# EAGLE board Control_Logic (EAGLE 9.3.2)
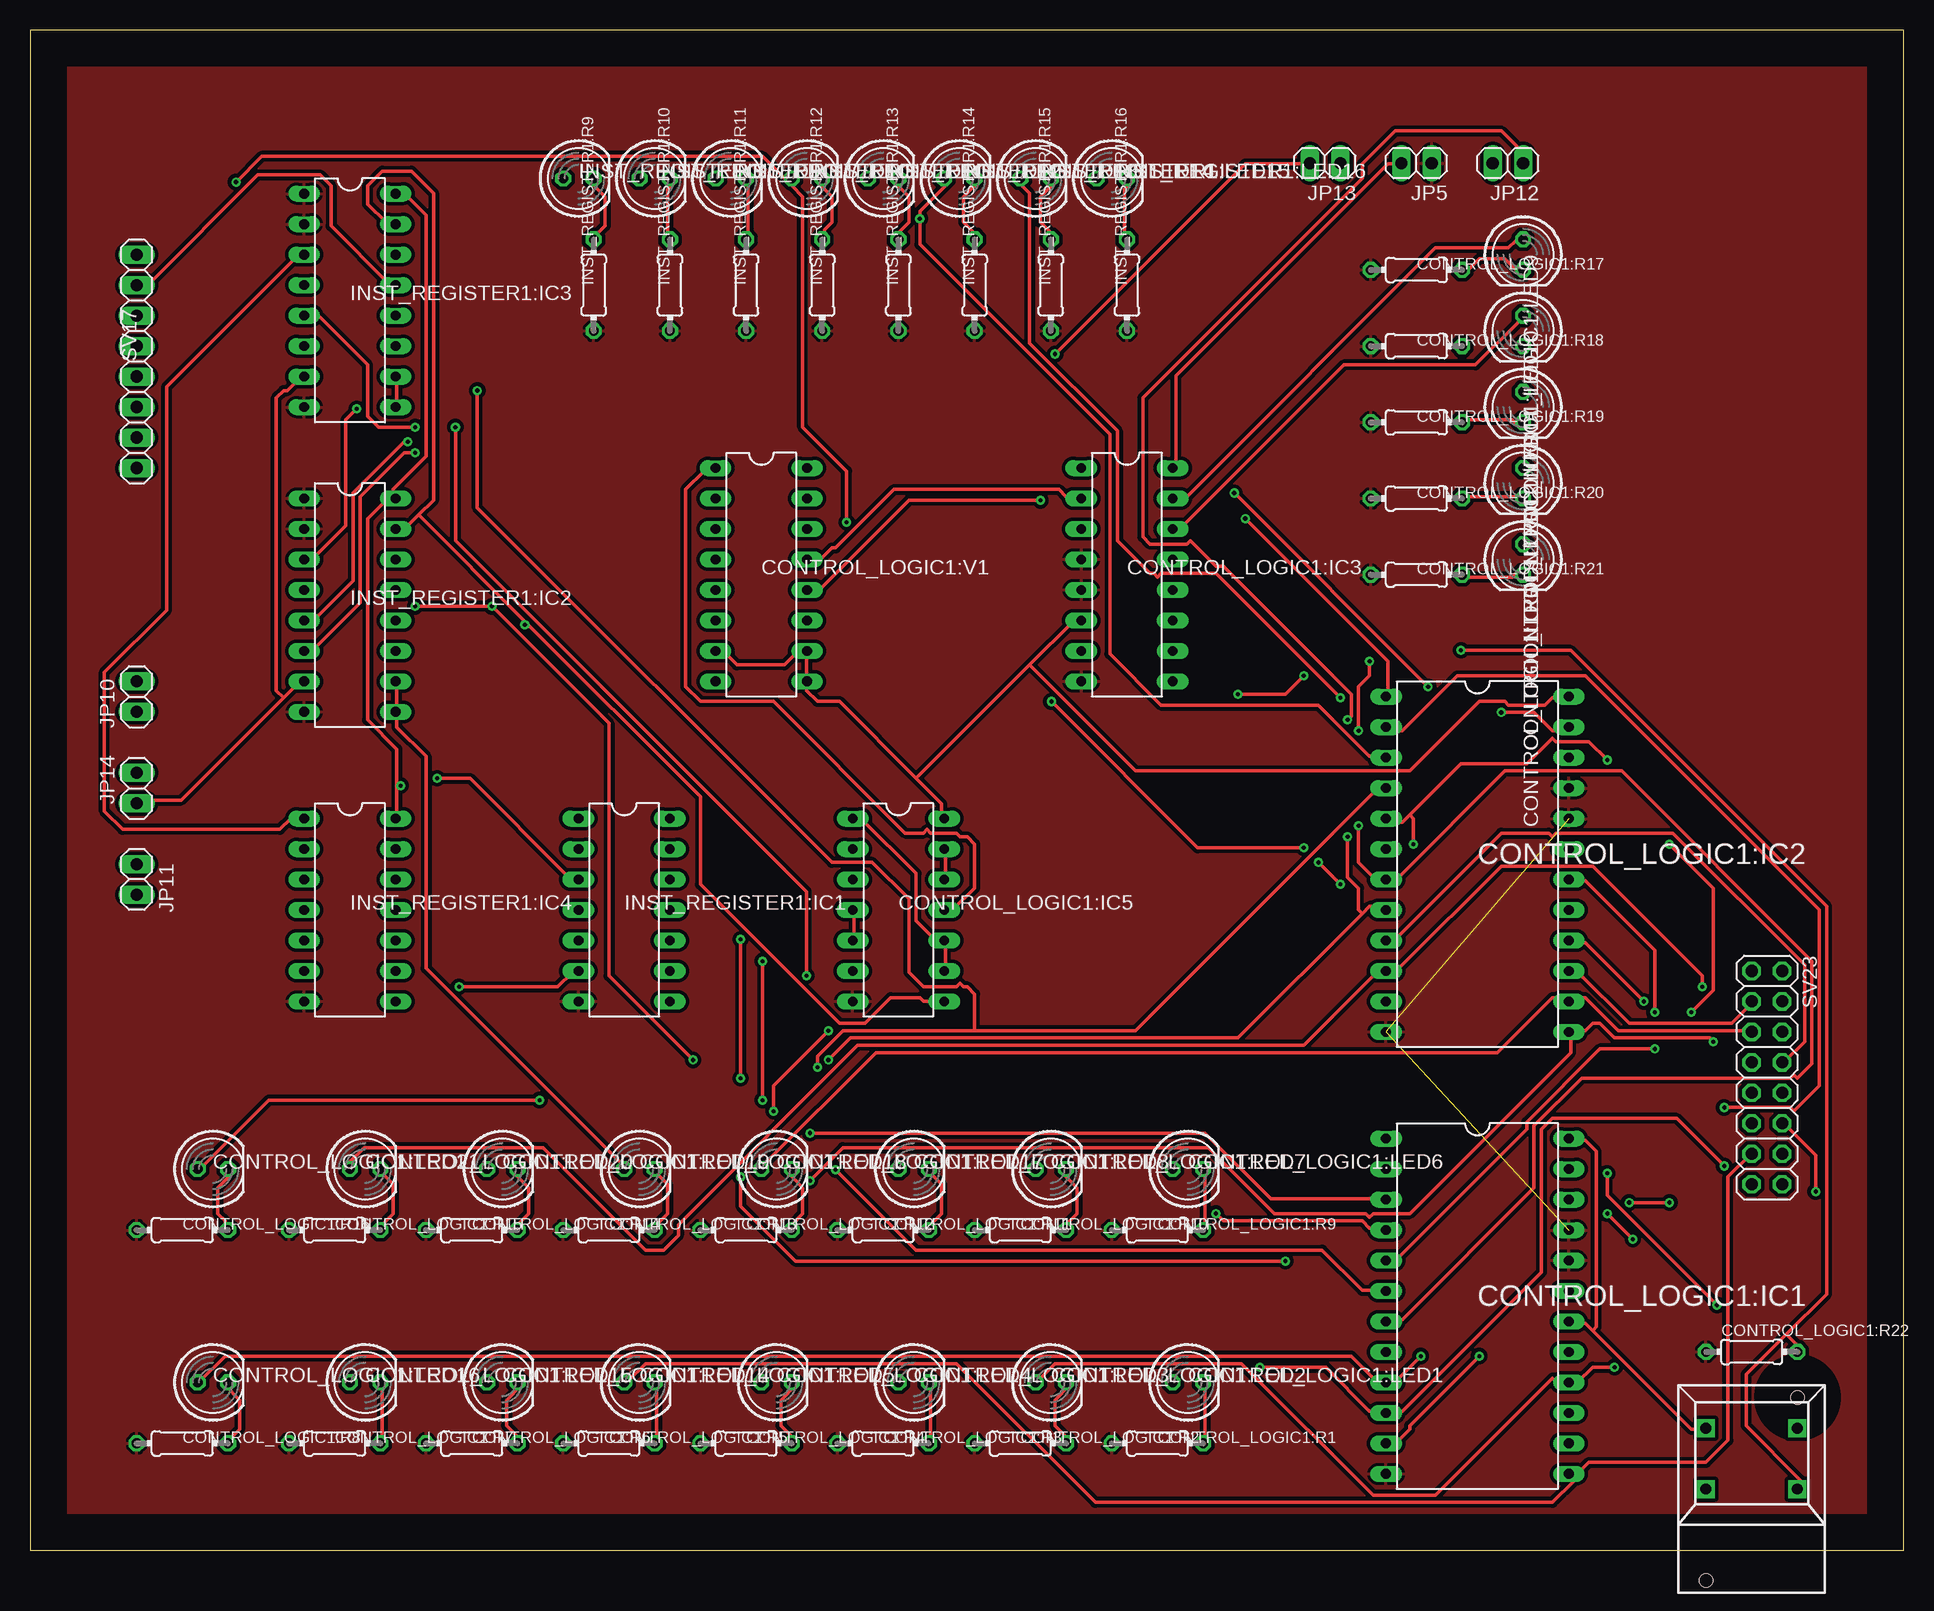
[diagram p0: board, top side]
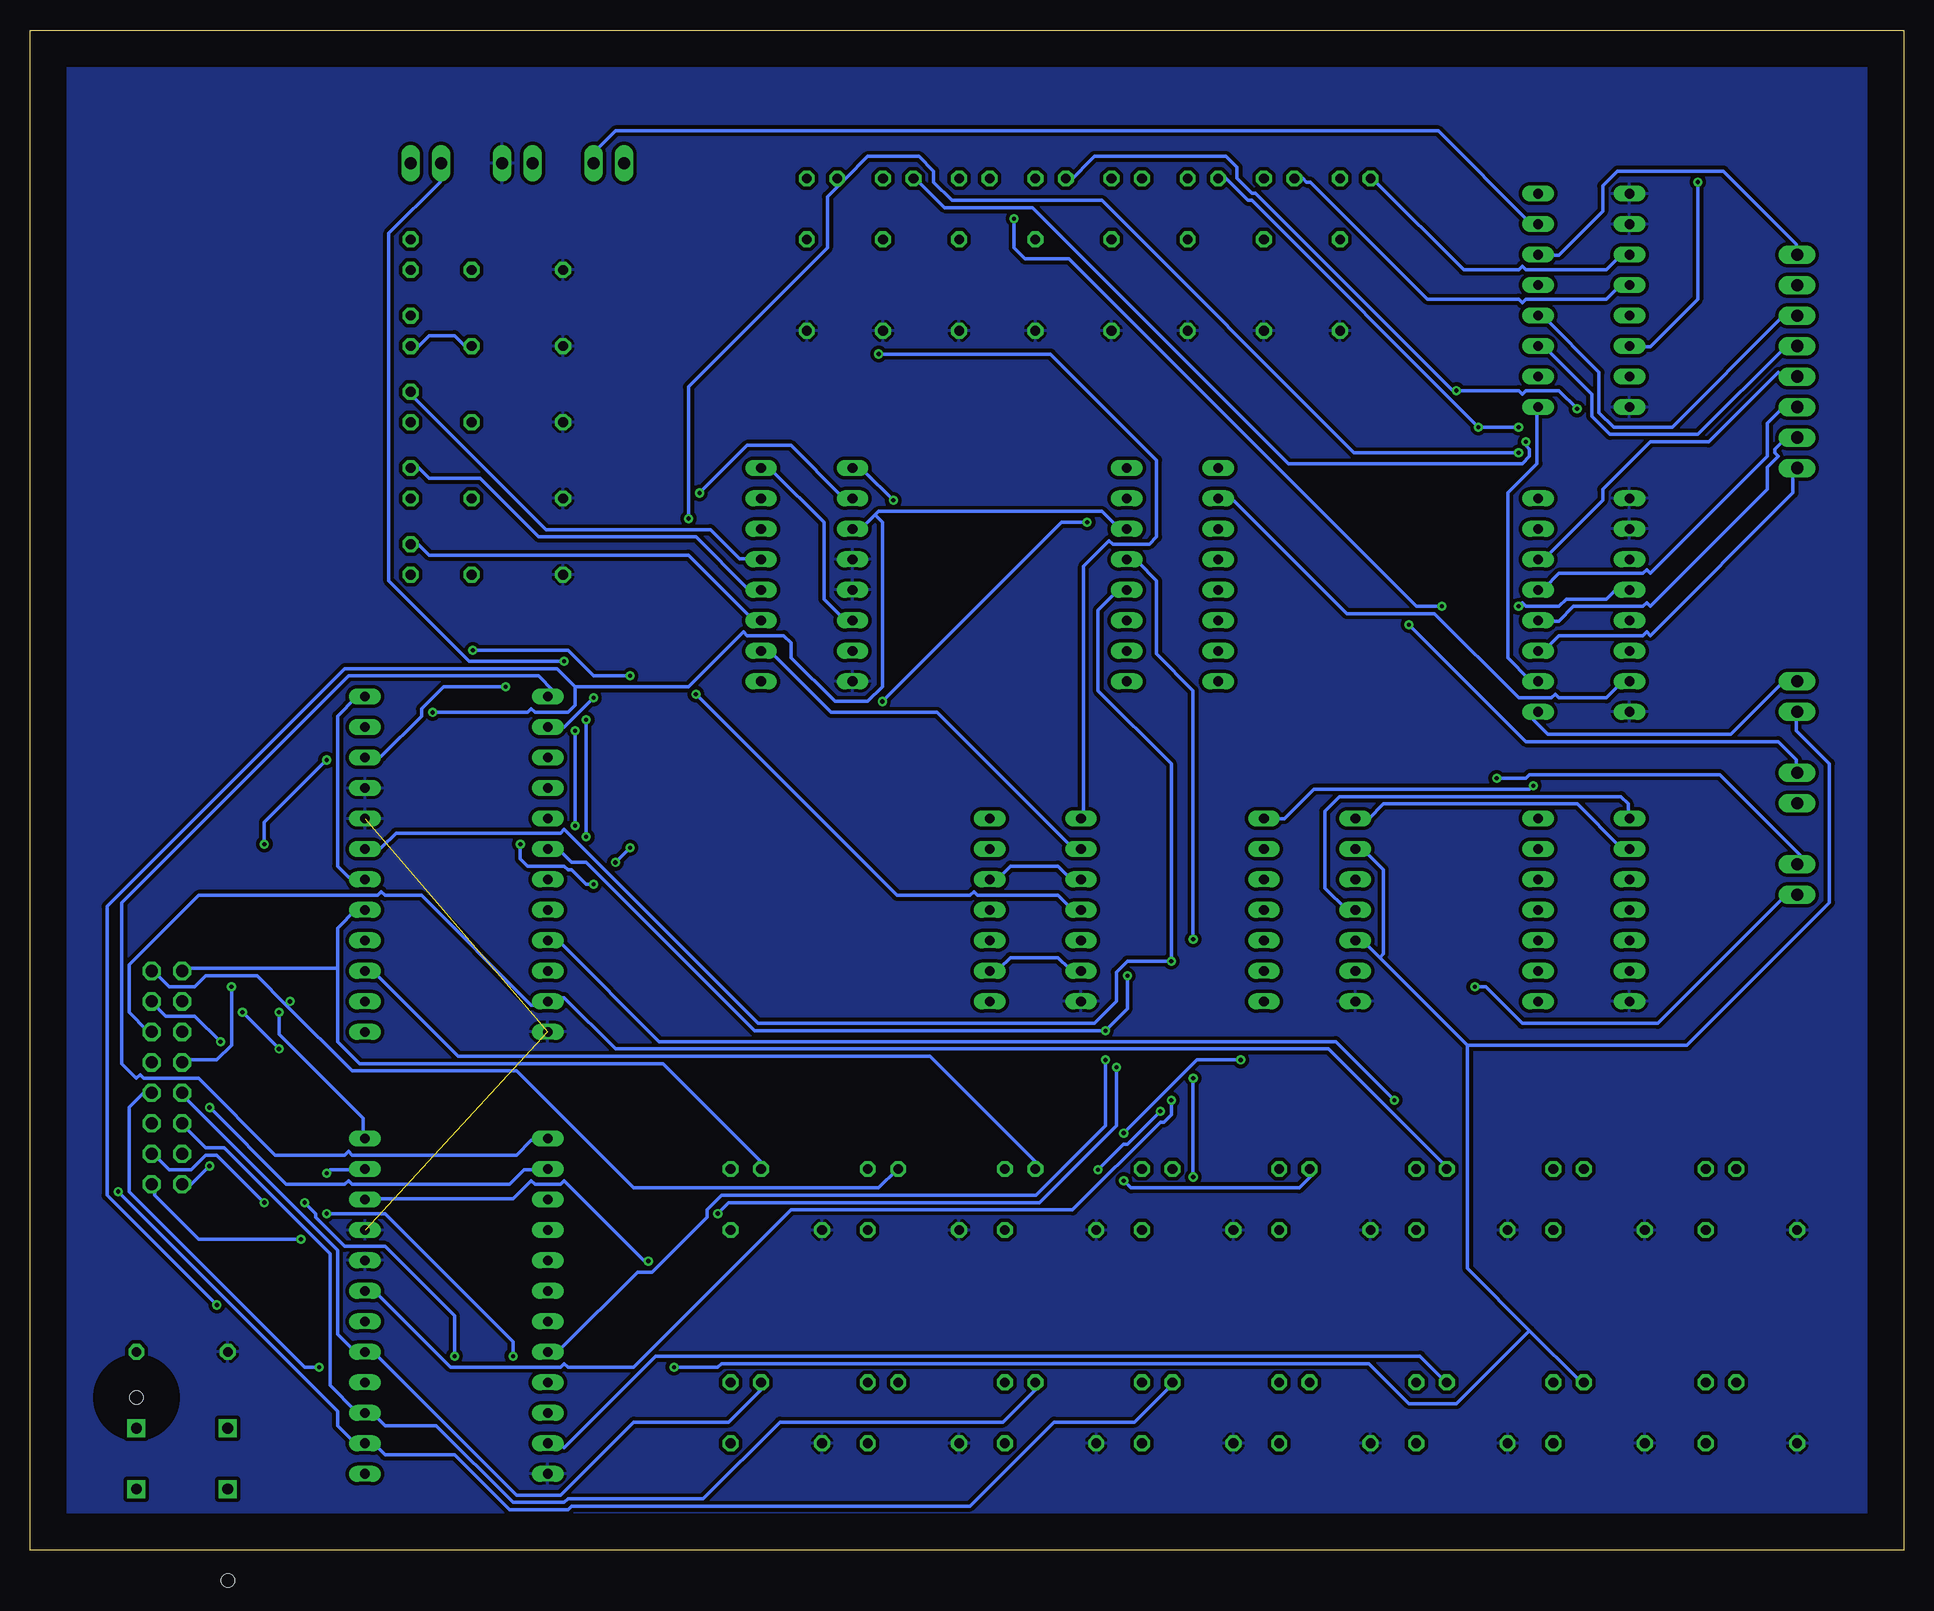
[diagram p1: board, bottom side, seen from below]

Size 156.19 x 126.67 mm. Coordinates in mm from the lower left corner, seen from the top.
Outline: 0,0 156.19,0 156.19,126.67 0,126.67 0,0
Copper layers (1*16): Top 0.035mm / dielectric 1.5mm / Bottom 0.035mm
Design rules "Endustriyel": minimum track width 12mil, minimum drill 0.35mm, track to track 12mil, track to pad 12mil, pad to pad 12mil, via to via 12mil, smd to smd 6mil, copper to edge 120mil, drill to drill 12mil, minimum pad ring 10mil, minimum via ring 8mil, stop-mask expansion 4mil, vias tented up to drill 0mil, thermal gap 10mil
Net classes: 0 default: width 0.254 mm

## Footprints (pad centres in the part's own frame; a part is rotated, then mirrored left to right if it is on the bottom)
DIL24 = drill 0.813 long: 1 -13.97,-7.62; 2 -11.43,-7.62; 3 -8.89,-7.62; 4 -6.35,-7.62; 5 -3.81,-7.62; 6 -1.27,-7.62; 7 1.27,-7.62; 8 3.81,-7.62; 9 6.35,-7.62; 10 8.89,-7.62; 11 11.43,-7.62; 12 13.97,-7.62; 13 13.97,7.62; 14 11.43,7.62; 15 8.89,7.62; 16 6.35,7.62; 17 3.81,7.62; 18 1.27,7.62; 19 -1.27,7.62; 20 -3.81,7.62; 21 -6.35,7.62; 22 -8.89,7.62; 23 -11.43,7.62; 24 -13.97,7.62
DIL16 = drill 0.813 long: 1 -8.89,-3.81; 2 -6.35,-3.81; 3 -3.81,-3.81; 4 -1.27,-3.81; 5 1.27,-3.81; 6 3.81,-3.81; 7 6.35,-3.81; 8 8.89,-3.81; 9 8.89,3.81; 10 6.35,3.81; 11 3.81,3.81; 12 1.27,3.81; 13 -1.27,3.81; 14 -3.81,3.81; 15 -6.35,3.81; 16 -8.89,3.81
DIL14 = drill 0.813 long: 1 -7.62,-3.81; 2 -5.08,-3.81; 3 -2.54,-3.81; 4 0,-3.81; 5 2.54,-3.81; 6 5.08,-3.81; 7 7.62,-3.81; 8 7.62,3.81; 9 5.08,3.81; 10 2.54,3.81; 11 0,3.81; 12 -2.54,3.81; 13 -5.08,3.81; 14 -7.62,3.81
LED5MM = drill 0.813 octagon: A -1.27,0; K 1.27,0
0204/7 = drill 0.813 octagon: 1 -3.81,0; 2 3.81,0
5501 = drill 0.9 pad 1.5 square: 1A 0,3.81; 1B 0,-3.81; NC 5.08,-3.81; NO 5.08,3.81 | hole 1.1: -7.62,3.81; 7.62,-3.81
1X02 = drill 1.016 long: 1 -1.27,0; 2 1.27,0
1X08 = drill 1.016 long: 1 -8.89,0; 2 -6.35,0; 3 -3.81,0; 4 -1.27,0; 5 1.27,0; 6 3.81,0; 7 6.35,0; 8 8.89,0
2X08 = drill 1.016 octagon: 1 -8.89,-1.27; 2 -8.89,1.27; 3 -6.35,-1.27; 4 -6.35,1.27; 5 -3.81,-1.27; 6 -3.81,1.27; 7 -1.27,-1.27; 8 -1.27,1.27; 9 1.27,-1.27; 10 1.27,1.27; 11 3.81,-1.27; 12 3.81,1.27; 13 6.35,-1.27; 14 6.35,1.27; 15 8.89,-1.27; 16 8.89,1.27

## Placement (x,y rotation side)
CONTROL_LOGIC1:IC1  [DIL24]  120.65,20.32 270 top
CONTROL_LOGIC1:IC2  [DIL24]  120.65,57.15 270 top
CONTROL_LOGIC1:IC3  74AC138N  [DIL16]  91.44,81.28 270 top
CONTROL_LOGIC1:IC5  74AC00N  [DIL14]  72.39,53.34 270 top
CONTROL_LOGIC1:LED1  [LED5MM]  96.52,13.97 0 top
CONTROL_LOGIC1:LED2  [LED5MM]  85.09,13.97 0 top
CONTROL_LOGIC1:LED3  [LED5MM]  73.66,13.97 0 top
CONTROL_LOGIC1:LED4  [LED5MM]  62.23,13.97 0 top
CONTROL_LOGIC1:LED5  [LED5MM]  50.8,13.97 0 top
CONTROL_LOGIC1:LED6  [LED5MM]  96.52,31.75 0 top
CONTROL_LOGIC1:LED7  [LED5MM]  85.09,31.75 0 top
CONTROL_LOGIC1:LED8  [LED5MM]  73.66,31.75 0 top
CONTROL_LOGIC1:LED9  [LED5MM]  124.46,107.95 270 top
CONTROL_LOGIC1:LED10  [LED5MM]  124.46,101.6 270 top
CONTROL_LOGIC1:LED11  [LED5MM]  124.46,95.25 270 top
CONTROL_LOGIC1:LED12  [LED5MM]  124.46,88.9 270 top
CONTROL_LOGIC1:LED13  [LED5MM]  124.46,82.55 270 top
CONTROL_LOGIC1:LED14  [LED5MM]  39.37,13.97 0 top
CONTROL_LOGIC1:LED15  [LED5MM]  27.94,13.97 0 top
CONTROL_LOGIC1:LED16  [LED5MM]  15.24,13.97 0 top
CONTROL_LOGIC1:LED17  [LED5MM]  62.23,31.75 0 top
CONTROL_LOGIC1:LED18  [LED5MM]  50.8,31.75 0 top
CONTROL_LOGIC1:LED19  [LED5MM]  39.37,31.75 0 top
CONTROL_LOGIC1:LED20  [LED5MM]  27.94,31.75 0 top
CONTROL_LOGIC1:LED21  [LED5MM]  15.24,31.75 0 top
CONTROL_LOGIC1:R1  220  [0204/7]  93.98,8.89 0 top
CONTROL_LOGIC1:R2  220  [0204/7]  82.55,8.89 0 top
CONTROL_LOGIC1:R3  220  [0204/7]  71.12,8.89 0 top
CONTROL_LOGIC1:R4  220  [0204/7]  59.69,8.89 0 top
CONTROL_LOGIC1:R5  220  [0204/7]  48.26,8.89 0 top
CONTROL_LOGIC1:R6  220  [0204/7]  36.83,8.89 0 top
CONTROL_LOGIC1:R7  220  [0204/7]  25.4,8.89 0 top
CONTROL_LOGIC1:R8  220  [0204/7]  12.7,8.89 0 top
CONTROL_LOGIC1:R9  220  [0204/7]  93.98,26.67 0 top
CONTROL_LOGIC1:R10  220  [0204/7]  82.55,26.67 0 top
CONTROL_LOGIC1:R11  220  [0204/7]  71.12,26.67 0 top
CONTROL_LOGIC1:R12  220  [0204/7]  59.69,26.67 0 top
CONTROL_LOGIC1:R13  220  [0204/7]  48.26,26.67 0 top
CONTROL_LOGIC1:R14  220  [0204/7]  36.83,26.67 0 top
CONTROL_LOGIC1:R15  220  [0204/7]  25.4,26.67 0 top
CONTROL_LOGIC1:R16  220  [0204/7]  12.7,26.67 0 top
CONTROL_LOGIC1:R17  220  [0204/7]  115.57,106.68 0 top
CONTROL_LOGIC1:R18  220  [0204/7]  115.57,100.33 0 top
CONTROL_LOGIC1:R19  220  [0204/7]  115.57,93.98 0 top
CONTROL_LOGIC1:R20  220  [0204/7]  115.57,87.63 0 top
CONTROL_LOGIC1:R21  220  [0204/7]  115.57,81.28 0 top
CONTROL_LOGIC1:R22  10K  [0204/7]  143.51,16.51 0 top
CONTROL_LOGIC1:S1  5501  [5501]  143.51,5.08 90 top
CONTROL_LOGIC1:V1  74161N  [DIL16]  60.96,81.28 270 top
INST_REGISTER1:IC1  74ALS09N  [DIL14]  49.53,53.34 270 top
INST_REGISTER1:IC2  74HC173N  [DIL16]  26.67,78.74 270 top
INST_REGISTER1:IC3  74HC173N  [DIL16]  26.67,104.14 270 top
INST_REGISTER1:IC4  74AC04N  [DIL14]  26.67,53.34 270 top
INST_REGISTER1:LED9  [LED5MM]  45.72,114.3 0 top
INST_REGISTER1:LED10  [LED5MM]  52.07,114.3 0 top
INST_REGISTER1:LED11  [LED5MM]  58.42,114.3 0 top
INST_REGISTER1:LED12  [LED5MM]  64.77,114.3 0 top
INST_REGISTER1:LED13  [LED5MM]  71.12,114.3 0 top
INST_REGISTER1:LED14  [LED5MM]  77.47,114.3 0 top
INST_REGISTER1:LED15  [LED5MM]  83.82,114.3 0 top
INST_REGISTER1:LED16  [LED5MM]  90.17,114.3 0 top
INST_REGISTER1:R9  220  [0204/7]  46.99,105.41 90 top
INST_REGISTER1:R10  220  [0204/7]  53.34,105.41 90 top
INST_REGISTER1:R11  220  [0204/7]  59.69,105.41 90 top
INST_REGISTER1:R12  220  [0204/7]  66.04,105.41 90 top
INST_REGISTER1:R13  220  [0204/7]  72.39,105.41 90 top
INST_REGISTER1:R14  220  [0204/7]  78.74,105.41 90 top
INST_REGISTER1:R15  220  [0204/7]  85.09,105.41 90 top
INST_REGISTER1:R16  220  [0204/7]  91.44,105.41 90 top
JP5  [1X02]  115.57,115.57 180 top
JP10  [1X02]  8.89,71.12 90 top
JP11  [1X02]  8.89,55.88 270 top
JP12  [1X02]  123.19,115.57 180 top
JP13  [1X02]  107.95,115.57 180 top
JP14  [1X02]  8.89,63.5 90 top
SV17  [1X08]  8.89,99.06 90 top
SV23  [2X08]  144.78,39.37 270 top

## Library data of the parts
CONTROL_LOGIC1:IC1 CONTROL_LOGIC1:IC2 = memory
CONTROL_LOGIC1:IC3 CONTROL_LOGIC1:IC5 INST_REGISTER1:IC1-INST_REGISTER1:IC4 = 74xx-eu
CONTROL_LOGIC1:LED1-CONTROL_LOGIC1:LED21 INST_REGISTER1:LED9-INST_REGISTER1:LED16 = led
CONTROL_LOGIC1:R1-CONTROL_LOGIC1:R22 INST_REGISTER1:R9-INST_REGISTER1:R16 = rcl; SPICEPREFIX: R
CONTROL_LOGIC1:S1 = switch
CONTROL_LOGIC1:V1 = 74ttl-din
JP5 JP10-JP14 = pinhead
SV17 SV23 = pinhead; OC_FARNELL: unknown; OC_NEWARK: unknown

## Nets
8B_1: INST_REGISTER1:IC3.14 SV17.8
8B_2: INST_REGISTER1:IC3.13 SV17.7
8B_3: INST_REGISTER1:IC3.12 SV17.6
8B_4: INST_REGISTER1:IC3.11 SV17.5
8B_5: INST_REGISTER1:IC2.14 SV17.4
8B_6: INST_REGISTER1:IC2.13 SV17.3
8B_7: INST_REGISTER1:IC2.12 SV17.2
8B_8: INST_REGISTER1:IC2.11 SV17.1
ALUSUB: CONTROL_LOGIC1:IC1.15 CONTROL_LOGIC1:LED3.A SV23.11
CF: CONTROL_LOGIC1:IC1.7 CONTROL_LOGIC1:IC2.7 JP12.2
CLK: CONTROL_LOGIC1:V1.2 INST_REGISTER1:IC2.7 INST_REGISTER1:IC3.7 JP14.1
CLR: CONTROL_LOGIC1:IC5.8 INST_REGISTER1:IC2.15 INST_REGISTER1:IC3.15 JP13.1 JP14.2
CONTROL_LOGIC1:+UB: CONTROL_LOGIC1:V1.16
CONTROL_LOGIC1:-UB: CONTROL_LOGIC1:V1.8
CONTROL_LOGIC1:N$1: CONTROL_LOGIC1:IC1.19 CONTROL_LOGIC1:IC2.19 CONTROL_LOGIC1:IC3.1 CONTROL_LOGIC1:V1.12
CONTROL_LOGIC1:N$2: CONTROL_LOGIC1:IC1.22 CONTROL_LOGIC1:IC2.22 CONTROL_LOGIC1:IC3.2 CONTROL_LOGIC1:V1.13
CONTROL_LOGIC1:N$3: CONTROL_LOGIC1:IC1.23 CONTROL_LOGIC1:IC2.23 CONTROL_LOGIC1:IC3.3 CONTROL_LOGIC1:V1.14
CONTROL_LOGIC1:N$4: CONTROL_LOGIC1:IC3.10 CONTROL_LOGIC1:IC5.2
CONTROL_LOGIC1:N$5: CONTROL_LOGIC1:IC3.15 CONTROL_LOGIC1:LED9.A
CONTROL_LOGIC1:N$6: CONTROL_LOGIC1:IC3.14 CONTROL_LOGIC1:LED10.A
CONTROL_LOGIC1:N$7: CONTROL_LOGIC1:IC5.3 CONTROL_LOGIC1:IC5.12 CONTROL_LOGIC1:IC5.13
CONTROL_LOGIC1:N$8: CONTROL_LOGIC1:IC5.11 CONTROL_LOGIC1:V1.1
CONTROL_LOGIC1:N$9: CONTROL_LOGIC1:IC3.13 CONTROL_LOGIC1:LED11.A
CONTROL_LOGIC1:N$10: CONTROL_LOGIC1:IC3.12 CONTROL_LOGIC1:LED12.A
CONTROL_LOGIC1:N$11: CONTROL_LOGIC1:IC3.11 CONTROL_LOGIC1:LED13.A
CONTROL_LOGIC1:N$12: CONTROL_LOGIC1:LED6.K CONTROL_LOGIC1:R9.2
CONTROL_LOGIC1:N$13: CONTROL_LOGIC1:LED7.K CONTROL_LOGIC1:R10.2
CONTROL_LOGIC1:N$14: CONTROL_LOGIC1:LED8.K CONTROL_LOGIC1:R11.2
CONTROL_LOGIC1:N$15: CONTROL_LOGIC1:LED17.K CONTROL_LOGIC1:R12.2
CONTROL_LOGIC1:N$16: CONTROL_LOGIC1:LED18.K CONTROL_LOGIC1:R13.2
CONTROL_LOGIC1:N$17: CONTROL_LOGIC1:LED19.K CONTROL_LOGIC1:R14.2
CONTROL_LOGIC1:N$18: CONTROL_LOGIC1:LED20.K CONTROL_LOGIC1:R15.2
CONTROL_LOGIC1:N$19: CONTROL_LOGIC1:LED21.K CONTROL_LOGIC1:R16.2
CONTROL_LOGIC1:N$20: CONTROL_LOGIC1:LED1.K CONTROL_LOGIC1:R1.2
CONTROL_LOGIC1:N$21: CONTROL_LOGIC1:LED2.K CONTROL_LOGIC1:R2.2
CONTROL_LOGIC1:N$22: CONTROL_LOGIC1:LED3.K CONTROL_LOGIC1:R3.2
CONTROL_LOGIC1:N$23: CONTROL_LOGIC1:LED4.K CONTROL_LOGIC1:R4.2
CONTROL_LOGIC1:N$24: CONTROL_LOGIC1:LED5.K CONTROL_LOGIC1:R5.2
CONTROL_LOGIC1:N$25: CONTROL_LOGIC1:LED14.K CONTROL_LOGIC1:R6.2
CONTROL_LOGIC1:N$26: CONTROL_LOGIC1:LED15.K CONTROL_LOGIC1:R7.2
CONTROL_LOGIC1:N$28: CONTROL_LOGIC1:LED16.K CONTROL_LOGIC1:R8.2
CONTROL_LOGIC1:N$29: CONTROL_LOGIC1:LED9.K CONTROL_LOGIC1:R17.2
CONTROL_LOGIC1:N$30: CONTROL_LOGIC1:LED10.K CONTROL_LOGIC1:R18.2
CONTROL_LOGIC1:N$31: CONTROL_LOGIC1:LED11.K CONTROL_LOGIC1:R19.2
CONTROL_LOGIC1:N$32: CONTROL_LOGIC1:LED12.K CONTROL_LOGIC1:R20.2
CONTROL_LOGIC1:N$33: CONTROL_LOGIC1:LED13.K CONTROL_LOGIC1:R21.2
COUNT: CONTROL_LOGIC1:IC2.14 CONTROL_LOGIC1:LED17.A SV23.5
GND: CONTROL_LOGIC1:IC1.12 CONTROL_LOGIC1:IC1.20 CONTROL_LOGIC1:IC1.21 CONTROL_LOGIC1:IC2.12 CONTROL_LOGIC1:IC2.20 CONTROL_LOGIC1:IC2.21 CONTROL_LOGIC1:IC3.4 CONTROL_LOGIC1:IC3.5 CONTROL_LOGIC1:IC3.8 CONTROL_LOGIC1:IC5.7 CONTROL_LOGIC1:R1.1 CONTROL_LOGIC1:R2.1 CONTROL_LOGIC1:R3.1 CONTROL_LOGIC1:R4.1 CONTROL_LOGIC1:R5.1 CONTROL_LOGIC1:R6.1 CONTROL_LOGIC1:R7.1 CONTROL_LOGIC1:R8.1 CONTROL_LOGIC1:R9.1 CONTROL_LOGIC1:R10.1 CONTROL_LOGIC1:R11.1 CONTROL_LOGIC1:R12.1 CONTROL_LOGIC1:R13.1 CONTROL_LOGIC1:R14.1 CONTROL_LOGIC1:R15.1 CONTROL_LOGIC1:R16.1 CONTROL_LOGIC1:R17.1 CONTROL_LOGIC1:R18.1 CONTROL_LOGIC1:R19.1 CONTROL_LOGIC1:R20.1 CONTROL_LOGIC1:R21.1 CONTROL_LOGIC1:R22.1 INST_REGISTER1:IC1.7 INST_REGISTER1:IC2.1 INST_REGISTER1:IC2.2 INST_REGISTER1:IC2.8 INST_REGISTER1:IC3.1 INST_REGISTER1:IC3.2 INST_REGISTER1:IC3.8 INST_REGISTER1:IC4.7 INST_REGISTER1:R9.1 INST_REGISTER1:R10.1 INST_REGISTER1:R11.1 INST_REGISTER1:R12.1 INST_REGISTER1:R13.1 INST_REGISTER1:R14.1 INST_REGISTER1:R15.1 INST_REGISTER1:R16.1 JP5.1
HLT: CONTROL_LOGIC1:IC1.9 CONTROL_LOGIC1:LED16.A SV23.16
INST_REGISTER1:INST_2: INST_REGISTER1:IC3.4 INST_REGISTER1:LED10.A
INST_REGISTER1:N$1: INST_REGISTER1:LED9.K INST_REGISTER1:R9.2
INST_REGISTER1:N$2: INST_REGISTER1:LED10.K INST_REGISTER1:R10.2
INST_REGISTER1:N$3: INST_REGISTER1:LED11.K INST_REGISTER1:R11.2
INST_REGISTER1:N$4: INST_REGISTER1:IC1.1 INST_REGISTER1:IC4.2
INST_REGISTER1:N$5: INST_REGISTER1:LED12.K INST_REGISTER1:R12.2
INST_REGISTER1:N$6: INST_REGISTER1:LED13.K INST_REGISTER1:R13.2
INST_REGISTER1:N$7: INST_REGISTER1:LED14.K INST_REGISTER1:R14.2
INST_REGISTER1:N$8: INST_REGISTER1:LED15.K INST_REGISTER1:R15.2
INST_REGISTER1:N$9: INST_REGISTER1:LED16.K INST_REGISTER1:R16.2
INST_REGISTER1:SLC_REG: INST_REGISTER1:IC1.4 INST_REGISTER1:IC3.3 INST_REGISTER1:IC4.1 INST_REGISTER1:LED9.A
INST_REGISTER1:VCC: INST_REGISTER1:IC1.14 INST_REGISTER1:IC2.16 INST_REGISTER1:IC3.16 INST_REGISTER1:IC4.14
N$32: CONTROL_LOGIC1:IC1.6 CONTROL_LOGIC1:IC2.6 INST_REGISTER1:IC3.5 INST_REGISTER1:LED11.A
N$33: CONTROL_LOGIC1:IC1.5 CONTROL_LOGIC1:IC2.5 INST_REGISTER1:IC3.6 INST_REGISTER1:LED12.A
N$34: CONTROL_LOGIC1:IC1.4 CONTROL_LOGIC1:IC2.4 INST_REGISTER1:IC2.3 INST_REGISTER1:LED13.A
N$35: CONTROL_LOGIC1:IC1.3 CONTROL_LOGIC1:IC2.3 INST_REGISTER1:IC2.4 INST_REGISTER1:LED14.A
N$36: CONTROL_LOGIC1:IC1.2 CONTROL_LOGIC1:IC2.2 INST_REGISTER1:IC2.5 INST_REGISTER1:LED15.A
N$37: CONTROL_LOGIC1:IC1.1 CONTROL_LOGIC1:IC2.1 INST_REGISTER1:IC2.6 INST_REGISTER1:LED16.A
N$79: CONTROL_LOGIC1:IC2.15 CONTROL_LOGIC1:LED8.A SV23.3
N$80: CONTROL_LOGIC1:IC2.16 CONTROL_LOGIC1:LED7.A SV23.2
N$81: CONTROL_LOGIC1:IC2.17 CONTROL_LOGIC1:LED6.A SV23.1
PC_LE: CONTROL_LOGIC1:IC1.16 CONTROL_LOGIC1:LED2.A SV23.10
PC_LRS: CONTROL_LOGIC1:IC1.17 CONTROL_LOGIC1:LED1.A SV23.9
RAM_LRS: CONTROL_LOGIC1:IC2.9 CONTROL_LOGIC1:LED21.A SV23.8
S$3: CONTROL_LOGIC1:IC5.4 CONTROL_LOGIC1:IC5.5 CONTROL_LOGIC1:R22.2 CONTROL_LOGIC1:S1.1B
SLC_ADDR: CONTROL_LOGIC1:IC2.10 CONTROL_LOGIC1:LED20.A SV23.7
VCC: CONTROL_LOGIC1:IC1.18 CONTROL_LOGIC1:IC1.24 CONTROL_LOGIC1:IC2.18 CONTROL_LOGIC1:IC2.24 CONTROL_LOGIC1:IC3.6 CONTROL_LOGIC1:IC3.16 CONTROL_LOGIC1:IC5.14 CONTROL_LOGIC1:S1.NO CONTROL_LOGIC1:V1.7 CONTROL_LOGIC1:V1.9 CONTROL_LOGIC1:V1.10 JP5.2
ZF: CONTROL_LOGIC1:IC1.8 CONTROL_LOGIC1:IC2.8 JP12.1
|ALUWRITE: CONTROL_LOGIC1:IC1.14 CONTROL_LOGIC1:LED4.A SV23.12
|AREAD: INST_REGISTER1:IC1.3 JP11.1
|AWRITE: CONTROL_LOGIC1:IC1.11 CONTROL_LOGIC1:LED14.A SV23.14
|BREAD: INST_REGISTER1:IC1.6 JP11.2
|CLR: CONTROL_LOGIC1:IC5.1 CONTROL_LOGIC1:IC5.6 CONTROL_LOGIC1:IC5.9 CONTROL_LOGIC1:IC5.10 JP13.2
|FL: CONTROL_LOGIC1:IC1.13 CONTROL_LOGIC1:LED5.A SV23.13
|INSTREAD: CONTROL_LOGIC1:IC2.13 CONTROL_LOGIC1:LED18.A INST_REGISTER1:IC2.9 INST_REGISTER1:IC2.10 INST_REGISTER1:IC3.9 INST_REGISTER1:IC3.10 JP10.2 SV23.4
|RAM_OUT: CONTROL_LOGIC1:IC2.11 CONTROL_LOGIC1:LED19.A SV23.6
|REG_READ: CONTROL_LOGIC1:IC1.10 CONTROL_LOGIC1:LED15.A INST_REGISTER1:IC1.2 INST_REGISTER1:IC1.5 JP10.1 SV23.15

## Tracks (layer width: path | path; a pad name or v marks a point on that pad's centre or on a via)
8B_1
  Bottom 0.305: INST_REGISTER1:IC3.14 30.28,107.9 28.75,107.9 25.09,111.56 25.09,113.69 23.88,114.91 15.04,114.91 8.94,108.81 8.94,108.2 SV17.8
8B_2
  Top 0.305: INST_REGISTER1:IC3.13 30.28,105.46 29.97,105.46 25.09,110.34 25.09,113.69 24.18,114.61 19,114.61 9.86,105.46 8.94,105.46 SV17.7
8B_3
  Bottom 0.305: INST_REGISTER1:IC3.12 30.28,102.72 29.97,102.72 25.4,98.15 25.4,94.79 24.18,93.57 19.3,93.57 10.16,102.72 8.94,102.72 SV17.6
8B_4
  Bottom 0.305: INST_REGISTER1:IC3.11 30.28,100.28 29.97,100.28 26.01,96.32 26.01,94.49 24.49,92.96 17.17,92.96 9.86,100.28 8.94,100.28 SV17.5
8B_5
  Bottom 0.305: INST_REGISTER1:IC2.14 30.28,82.6 29.97,82.6 25.09,87.48 25.09,88.39 21.13,92.35 16.26,92.35 10.46,98.15 10.16,97.84 8.94,97.84 SV17.4
8B_6
  Bottom 0.305: INST_REGISTER1:IC2.13 30.28,80.16 29.97,80.16 28.75,81.38 21.74,81.38 21.44,81.69 21.13,81.38 11.38,91.14 11.38,93.88 10.16,95.1 8.94,95.1 SV17.3
8B_7
  Bottom 0.305: INST_REGISTER1:IC2.12 30.28,77.42 28.75,77.42 27.53,78.64 21.74,78.64 21.44,78.94 21.13,78.64 11.38,88.39 11.38,90.22 10.46,91.14 10.77,91.44 10.77,91.75 9.86,92.66 8.94,92.66 SV17.2
8B_8
  Bottom 0.305: INST_REGISTER1:IC2.11 30.28,74.98 29.97,74.98 28.75,76.2 21.74,76.2 21.44,76.5 21.13,76.2 9.25,88.09 9.25,89.61 8.94,89.92 SV17.1
ALUSUB
  Bottom 0.305: CONTROL_LOGIC1:LED3.A 72.34,13.72 72.34,13.41 75.08,10.67 93.68,10.67 100.08,4.27 111.35,4.27 111.66,3.96 115.93,3.96 122.33,10.36 126.59,10.36 127.51,11.28 128.12,11.28 CONTROL_LOGIC1:IC1.15 128.42,11.58 129.03,11.58 131.17,13.72 131.17,24.69 140,33.53 141.53,33.53 143.36,35.36 SV23.11
CF  (via drill 0.35)
  Top 0.305: CONTROL_LOGIC1:IC1.7 113.18,19.2 114.4,19.2 125.37,30.18 125.37,35.36 129.34,39.32 146.71,39.32 147.01,39.62 147.32,39.32 148.54,40.54 148.54,49.07 132.69,64.92 122.94,64.92 114.1,56.08 113.18,56.08 CONTROL_LOGIC1:IC2.7 112.88,56.08 111.96,56.08 110.74,57.3 v110.74,60.35 | v111.66,74.07 111.66,72.85 110.74,71.93 v110.74,68.28
  Bottom 0.305: v111.66,74.07 119.58,74.07 126.29,80.77 126.29,109.73 122.02,114 122.02,115.52 JP12.2 | v110.74,60.35 v110.74,68.28
CLK
  Top 0.305: 21.13,71.02 12.6,62.48 8.94,62.48 JP14.1 | 21.13,71.02 22.35,72.24 22.66,72.24 INST_REGISTER1:IC2.7 | 21.13,71.02 20.52,71.63 20.52,96.01 21.13,96.62 21.44,96.62 22.35,97.54 22.66,97.54 INST_REGISTER1:IC3.7
  Bottom 0.305: CONTROL_LOGIC1:V1.2 57.1,87.48 55.88,87.48 46.43,78.03 39.12,78.03 32.11,71.02 29.36,71.02 29.06,71.32 28.75,71.02 24.79,71.02 23.57,72.24 22.96,72.24 INST_REGISTER1:IC2.7
CLR  (via drill 0.35)
  Top 0.305: 32.41,86.26 33.63,87.48 33.63,113.08 31.8,114.91 29.36,114.91 28.14,113.69 28.14,112.17 29.67,110.64 30.28,110.64 INST_REGISTER1:IC3.15 | 32.41,86.26 31.5,85.34 30.58,85.34 INST_REGISTER1:IC2.15 | CONTROL_LOGIC1:IC5.8 74.47,45.72 74.17,46.02 71.73,46.02 69.6,43.89 67.46,43.89 55.88,55.47 55.88,62.79 41.25,77.42 | 32.41,86.26 41.25,77.42 | 41.25,77.42 v41.25,77.11
  Bottom 0.305: v41.25,77.11 31.5,67.36 10.46,67.36 8.94,65.84 8.94,64.92 JP14.2 | JP13.1 109.22,116.43 107.39,118.26 38.81,118.26 31.19,110.64 30.58,110.64 INST_REGISTER1:IC3.15
CONTROL_LOGIC1:N$1  (via drill 0.35)
  Top 0.305: v84.23,87.48 73.25,87.48 65.94,80.16 65.02,80.16 CONTROL_LOGIC1:V1.12 | v61.06,49.07 v61.06,37.49
  Bottom 0.305: v84.23,87.48 86.67,89.92 87.58,89.92 CONTROL_LOGIC1:IC3.1 | v61.06,37.49 61.06,36.27 61.67,35.66 61.98,35.66 69.29,28.35 92.76,28.35 105.87,15.24 111.35,15.24 111.66,15.54 111.96,15.24 121.11,15.24 127.2,21.34 128.12,21.34 CONTROL_LOGIC1:IC1.19 | CONTROL_LOGIC1:V1.12 65.02,79.86 65.63,79.86 67.16,78.33 67.16,71.63 61.06,65.53 v61.06,49.07 64.72,49.07 65.63,48.16 65.63,45.72 67.46,43.89 95.5,43.89 111.66,60.05 111.96,59.74 125.68,59.74 126.9,58.52 128.12,58.52 CONTROL_LOGIC1:IC2.19
CONTROL_LOGIC1:N$2  (via drill 0.35)
  Top 0.305: v104.65,24.08 63.8,24.08 59.23,28.65 v59.23,31.09 | v59.23,50.9 v59.23,39.32 | CONTROL_LOGIC1:IC3.2 87.58,87.78 86.36,87.78 85.75,88.39 72.03,88.39 67.16,83.52 66.85,83.52 65.94,82.6 65.02,82.6 CONTROL_LOGIC1:V1.13 | v100.38,88.09 v116.54,71.93
  Bottom 0.305: v104.65,24.08 104.95,24.08 111.66,30.79 111.96,30.48 114.1,30.48 114.4,30.79 115.93,29.26 128.12,29.26 CONTROL_LOGIC1:IC1.22 | v59.23,39.32 v59.23,31.09 | v59.23,50.9 59.23,71.63 62.28,74.68 62.28,80.77 63.8,82.3 64.72,82.3 CONTROL_LOGIC1:V1.13 | v116.54,71.93 121.72,71.93 123.55,70.1 123.55,69.49 126.9,66.14 128.12,66.14 CONTROL_LOGIC1:IC2.22 | v100.38,88.09 96.42,92.05 92.76,92.05 88.49,87.78 87.88,87.78 CONTROL_LOGIC1:IC3.2
CONTROL_LOGIC1:N$3  (via drill 0.35)
  Top 0.305: v131.47,31.39 131.47,29.57 v140.61,20.42 | v122.63,69.8 125.37,69.8 126.9,68.28 127.81,68.28 128.12,68.58 CONTROL_LOGIC1:IC2.23
  Bottom 0.305: 85.75,86.26 86.67,85.34 87.58,85.34 CONTROL_LOGIC1:IC3.3 | 85.75,86.26 85.45,86.56 66.85,86.56 65.63,85.34 65.02,85.34 CONTROL_LOGIC1:V1.14 | v131.47,31.39 131.17,31.7 128.42,31.7 CONTROL_LOGIC1:IC1.23 | v140.61,20.42 149.76,29.57 149.76,53.65 129.95,73.46 112.27,73.46 110.74,71.93 | 110.74,71.93 110.74,70.41 111.35,69.8 114.1,69.8 114.4,70.1 114.71,69.8 v122.63,69.8 | 85.75,86.26 85.14,85.65 85.14,71.93 86.36,70.71 89.1,70.71 92.76,74.37 92.76,75.59 93.37,76.2 96.42,76.2 96.72,76.5 101.3,71.93 110.74,71.93
CONTROL_LOGIC1:N$4
  Bottom 0.305: CONTROL_LOGIC1:IC5.2 68.68,58.52 69.29,58.52 80.57,69.8 89.41,69.8 94.29,74.68 95.2,74.68 CONTROL_LOGIC1:IC3.10
CONTROL_LOGIC1:N$5
  Top 0.305: CONTROL_LOGIC1:IC3.15 95.5,87.78 96.42,87.78 117.15,108.51 123.24,108.51 123.85,109.12 124.46,109.12 CONTROL_LOGIC1:LED9.A
CONTROL_LOGIC1:N$6
  Top 0.305: CONTROL_LOGIC1:IC3.14 95.5,85.34 96.11,85.34 109.53,98.75 120.5,98.75 124.16,102.41 124.16,102.72 124.46,103.02 CONTROL_LOGIC1:LED10.A
CONTROL_LOGIC1:N$7
  Top 0.305: CONTROL_LOGIC1:IC5.13 76.3,58.22 76.3,56.08 CONTROL_LOGIC1:IC5.12
  Bottom 0.305: CONTROL_LOGIC1:IC5.3 68.68,56.08 69.6,56.08 70.51,57 74.47,57 75.39,56.08 76,56.08 CONTROL_LOGIC1:IC5.12
CONTROL_LOGIC1:N$8
  Top 0.305: CONTROL_LOGIC1:IC5.11 76.91,53.34 78.74,55.17 78.74,58.83 78.13,59.44 77.52,59.44 77.22,59.74 75.08,59.74 74.78,60.05 74.47,59.74 72.95,59.74 61.98,70.71 55.88,70.71 54.66,71.93 54.66,88.39 56.19,89.92 57.1,89.92 CONTROL_LOGIC1:V1.1
CONTROL_LOGIC1:N$9
  Bottom 0.305: CONTROL_LOGIC1:IC3.13 95.5,82.6 97.03,82.6 99.47,85.04 113.18,85.04 124.16,96.01 124.16,96.32 124.46,96.62 CONTROL_LOGIC1:LED11.A
CONTROL_LOGIC1:N$10
  Bottom 0.305: CONTROL_LOGIC1:IC3.12 95.5,80.16 96.42,80.16 100.69,84.43 113.79,84.43 118.67,89.31 122.94,89.31 123.85,90.22 124.46,90.22 CONTROL_LOGIC1:LED12.A
CONTROL_LOGIC1:N$11
  Bottom 0.305: CONTROL_LOGIC1:LED13.A 123.85,83.82 122.94,82.91 101.3,82.91 96.11,77.72 95.5,77.72 CONTROL_LOGIC1:IC3.11
CONTROL_LOGIC1:N$12
  Top 0.305: CONTROL_LOGIC1:R9.2 97.94,26.82 97.94,31.7 CONTROL_LOGIC1:LED6.K
CONTROL_LOGIC1:N$13
  Top 0.305: CONTROL_LOGIC1:R10.2 86.36,27.13 87.27,28.04 87.27,30.18 86.36,31.09 CONTROL_LOGIC1:LED7.K
CONTROL_LOGIC1:N$14
  Top 0.305: CONTROL_LOGIC1:R11.2 75.08,26.82 75.08,27.13 76,28.04 76,30.48 74.78,31.7 CONTROL_LOGIC1:LED8.K
CONTROL_LOGIC1:N$15
  Top 0.305: CONTROL_LOGIC1:R12.2 63.5,27.13 64.41,28.04 64.41,30.18 63.5,31.09 CONTROL_LOGIC1:LED17.K
CONTROL_LOGIC1:N$16
  Top 0.305: CONTROL_LOGIC1:R13.2 52.22,26.82 52.22,27.13 53.14,28.04 53.14,30.48 51.92,31.7 CONTROL_LOGIC1:LED18.K
CONTROL_LOGIC1:N$17
  Top 0.305: CONTROL_LOGIC1:R14.2 40.64,27.13 41.55,28.04 41.55,30.18 40.64,31.09 CONTROL_LOGIC1:LED19.K
CONTROL_LOGIC1:N$18
  Top 0.305: CONTROL_LOGIC1:R15.2 29.36,26.82 29.36,27.13 30.28,28.04 30.28,30.48 29.06,31.7 CONTROL_LOGIC1:LED20.K
CONTROL_LOGIC1:N$19
  Top 0.305: CONTROL_LOGIC1:R16.2 16.26,26.82 16.26,27.43 15.65,28.04 15.65,30.18 16.56,31.09 16.56,31.7 CONTROL_LOGIC1:LED21.K
CONTROL_LOGIC1:N$20
  Top 0.305: CONTROL_LOGIC1:R1.2 97.94,9.14 97.94,13.72 CONTROL_LOGIC1:LED1.K
CONTROL_LOGIC1:N$21
  Top 0.305: CONTROL_LOGIC1:R2.2 86.36,9.45 85.45,10.36 85.45,12.5 86.67,13.72 86.36,14.02 CONTROL_LOGIC1:LED2.K
CONTROL_LOGIC1:N$22
  Top 0.305: CONTROL_LOGIC1:R3.2 75.08,9.14 75.08,13.72 CONTROL_LOGIC1:LED3.K
CONTROL_LOGIC1:N$23
  Top 0.305: CONTROL_LOGIC1:R4.2 63.5,9.45 62.59,10.36 62.59,12.5 63.8,13.72 63.5,14.02 CONTROL_LOGIC1:LED4.K
CONTROL_LOGIC1:N$24
  Top 0.305: CONTROL_LOGIC1:R5.2 52.22,9.14 52.22,13.72 CONTROL_LOGIC1:LED5.K
CONTROL_LOGIC1:N$25
  Top 0.305: CONTROL_LOGIC1:R6.2 40.64,9.45 39.73,10.36 39.73,12.5 40.95,13.72 40.64,14.02 CONTROL_LOGIC1:LED14.K
CONTROL_LOGIC1:N$26
  Top 0.305: CONTROL_LOGIC1:R7.2 29.36,9.14 29.36,13.72 CONTROL_LOGIC1:LED15.K
CONTROL_LOGIC1:N$28
  Top 0.305: CONTROL_LOGIC1:R8.2 16.56,9.14 17.48,10.06 17.48,12.5 16.26,13.72 CONTROL_LOGIC1:LED16.K
CONTROL_LOGIC1:N$29
  Top 0.305: CONTROL_LOGIC1:R17.2 119.89,106.68 120.8,107.59 122.94,107.59 123.85,106.68 CONTROL_LOGIC1:LED9.K
CONTROL_LOGIC1:N$30
  Bottom 0.305: CONTROL_LOGIC1:R18.2 119.58,100.28 119.89,100.28 120.8,101.19 122.94,101.19 123.85,100.28 124.46,100.28 CONTROL_LOGIC1:LED10.K
CONTROL_LOGIC1:N$31
  Top 0.305: CONTROL_LOGIC1:R19.2 119.58,94.18 123.55,94.18 123.85,93.88 124.46,93.88 CONTROL_LOGIC1:LED11.K
CONTROL_LOGIC1:N$32
  Top 0.305: CONTROL_LOGIC1:R20.2 119.58,87.78 124.46,87.78 CONTROL_LOGIC1:LED12.K
CONTROL_LOGIC1:N$33
  Top 0.305: CONTROL_LOGIC1:R21.2 119.58,81.08 123.55,81.08 123.85,81.38 124.46,81.38 CONTROL_LOGIC1:LED13.K
COUNT
  Top 0.305: CONTROL_LOGIC1:LED17.A 61.06,32 70.51,41.45 122.33,41.45 126.9,46.02 127.81,46.02 128.12,45.72 CONTROL_LOGIC1:IC2.14 128.42,45.72 128.73,46.02 129.64,46.02 132.38,43.28 143.36,43.28 SV23.5
GND  (2 unrouted)
  pour Top: 163.83,129.54 -2.54,129.54 -2.54,-1.27 163.83,-1.27
  pour Bottom: -5.08,133.35 -5.08,-6.35 167.64,-6.35 167.64,133.35
HLT  (via drill 0.35)
  Top 0.305: CONTROL_LOGIC1:LED16.A 14.12,14.02 16.26,16.15 110.13,16.15 112.27,14.02 112.88,14.02 CONTROL_LOGIC1:IC1.9 113.18,14.02 113.79,14.02 v115.93,16.15 | v131.47,28.04 v133.6,25.91
  Bottom 0.305: v133.6,25.91 142.14,25.91 145.8,29.57 145.8,30.48 SV23.16 | v131.47,28.04 126.59,28.04 115.93,17.37 v115.93,16.15
INST_REGISTER1:INST_2
  Bottom 0.305: INST_REGISTER1:LED10.A 50.09,114.3 49.78,114 49.48,114 39.73,104.24 32.11,104.24 31.8,103.94 31.5,104.24 24.79,104.24 23.88,105.16 22.96,105.16 INST_REGISTER1:IC3.4
INST_REGISTER1:N$1
  Top 0.305: INST_REGISTER1:R9.2 47.04,109.42 47.95,110.34 47.95,112.78 47.04,113.69 47.04,114.3 INST_REGISTER1:LED9.K
INST_REGISTER1:N$2
  Top 0.305: INST_REGISTER1:R10.2 53.14,109.42 53.14,113.39 53.44,113.69 53.44,114.3 INST_REGISTER1:LED10.K
INST_REGISTER1:N$3
  Top 0.305: INST_REGISTER1:R11.2 59.84,109.42 59.84,114.3 INST_REGISTER1:LED11.K
INST_REGISTER1:N$4
  Bottom 0.305: INST_REGISTER1:IC1.1 44.6,60.96 43.38,62.18 27.23,62.18 23.57,58.52 22.96,58.52 INST_REGISTER1:IC4.2
INST_REGISTER1:N$5
  Top 0.305: INST_REGISTER1:R12.2 66.24,109.42 66.24,110.03 66.85,110.64 66.85,112.78 65.94,113.69 65.94,114.3 INST_REGISTER1:LED12.K
INST_REGISTER1:N$6
  Top 0.305: INST_REGISTER1:R13.2 72.34,109.42 72.34,109.73 73.25,110.64 73.25,112.78 72.34,113.69 72.34,114.3 INST_REGISTER1:LED13.K
INST_REGISTER1:N$7
  Top 0.305: INST_REGISTER1:R14.2 78.74,109.73 77.83,110.64 77.83,112.78 78.74,113.69 INST_REGISTER1:LED14.K
INST_REGISTER1:N$8
  Top 0.305: INST_REGISTER1:R15.2 85.14,109.42 85.14,109.73 84.23,110.64 84.23,112.78 85.14,113.69 85.14,114.3 INST_REGISTER1:LED15.K
INST_REGISTER1:N$9
  Top 0.305: INST_REGISTER1:R16.2 91.24,109.42 91.24,113.39 91.54,113.69 91.54,114.3 INST_REGISTER1:LED16.K
INST_REGISTER1:SLC_REG
  Top 0.305: INST_REGISTER1:IC4.1 21.74,60.96 20.83,60.05 7.72,60.05 6.2,61.57 6.2,73.15 11.38,78.33 11.38,96.93 22.35,107.9 22.66,107.9 INST_REGISTER1:IC3.3
  Bottom 0.305: INST_REGISTER1:IC3.3 22.96,107.9 23.57,107.9 24.79,106.68 31.5,106.68 31.8,106.98 32.11,106.68 36.68,106.68 43.99,114 44.3,114 44.6,114.3 INST_REGISTER1:LED9.A | INST_REGISTER1:IC1.4 46.43,53.34 48.26,55.17 48.26,61.57 47.04,62.79 23.57,62.79 22.96,62.18 22.96,60.96 INST_REGISTER1:IC4.1
INST_REGISTER1:VCC  (via drill 0.35)
  Top 0.305: 30.58,63.7 30.58,66.75 28.14,69.19 28.14,85.95 29.67,87.48 30.28,87.48 INST_REGISTER1:IC2.16 30.28,87.78 30.28,88.39 33.02,91.14 33.02,111.25 31.5,112.78 30.58,112.78 INST_REGISTER1:IC3.16 | 30.58,63.7 30.58,60.96 INST_REGISTER1:IC4.14 | 30.58,63.7 v30.89,63.7
  Bottom 0.305: INST_REGISTER1:IC1.14 51.61,60.96 49.17,63.4 31.19,63.4 v30.89,63.7
N$32  (via drill 0.35)
  Top 0.305: v32.11,93.57 29.06,93.57 28.14,94.49 28.14,98.75 24.18,102.72 22.96,102.72 INST_REGISTER1:IC3.5 | v67.16,31.7 73.86,24.99 107.7,24.99 111.05,21.64 112.88,21.64 CONTROL_LOGIC1:IC1.6 | v61.98,36.58 61.98,38.71 v66.55,43.28 | v35.46,93.57 35.46,84.12 64.72,54.86 v64.72,47.85
  Bottom 0.305: v32.11,93.57 v35.46,93.57 54.36,112.47 54.66,112.47 56.49,114.3 INST_REGISTER1:LED11.A | v67.16,31.7 65.02,33.83 64.72,33.83 v61.98,36.58 | CONTROL_LOGIC1:IC2.6 112.88,58.22 111.96,58.22 111.05,57.3 109.83,57.3 95.81,43.28 v66.55,43.28 64.72,45.11 v64.72,47.85
N$33  (via drill 0.35)
  Top 0.305: v17.17,114 19.3,116.13 61.06,116.13 62.89,114.3 INST_REGISTER1:LED12.A 63.5,113.69 64.41,112.78 64.41,93.57 68.07,89.92 v68.07,85.65 | v135.43,41.76 130.86,41.76 124.77,35.66 124.77,35.05 114.1,24.38 113.18,24.38 CONTROL_LOGIC1:IC1.5 | v138.48,44.81 140.31,46.63 140.31,55.17 v136.65,58.83 | v131.47,65.84 129.95,67.36 127.2,67.36 126.9,67.67 124.77,65.53 119.28,65.53 115.01,61.27 | 115.01,61.27 114.4,60.66 113.49,60.66 113.18,60.96 CONTROL_LOGIC1:IC2.5 | v85.14,70.71 97.33,58.52 v106.17,58.52 | v109.22,55.47 v107.39,57.3 | v115.32,58.83 115.32,60.96 115.01,61.27
  Bottom 0.305: v17.17,114 17.17,104.24 21.13,100.28 22.66,100.28 INST_REGISTER1:IC3.6 | v138.48,44.81 v135.43,41.76 | v136.65,58.83 136.65,60.66 v131.47,65.84 | v68.07,85.65 70.21,85.65 v85.14,70.71 | v107.39,57.3 v106.17,58.52 | v109.22,55.47 109.83,55.47 111.05,56.69 111.35,56.69 111.66,57 114.71,57 115.32,57.61 v115.32,58.83
N$34  (via drill 0.35)
  Top 0.305: v27.23,95.1 26.31,94.18 26.31,85.34 23.57,82.6 22.96,82.6 INST_REGISTER1:IC2.3 | v98.86,28.04 99.47,27.43 111.05,27.43 111.66,26.82 112.88,26.82 CONTROL_LOGIC1:IC1.4 | v65.63,40.23 65.63,41.15 67.77,43.28 78.74,43.28 | 78.74,43.28 92.15,43.28 112.27,63.4 112.88,63.4 CONTROL_LOGIC1:IC2.4 | v37.29,96.62 37.29,86.87 66.85,57.3 70.21,57.3 73.25,54.25 73.25,48.16 74.47,46.94 77.22,46.94 77.52,47.24 77.83,46.94 78.13,46.94 78.74,46.33 78.74,43.28
  Bottom 0.305: v27.23,95.1 28.75,96.62 31.5,96.62 31.8,96.32 32.11,96.62 v37.29,96.62 37.59,96.62 54.05,113.08 54.36,113.08 55.57,114.3 55.57,115.21 56.49,116.13 67.46,116.13 69.6,114 69.9,114.3 INST_REGISTER1:LED13.A | v98.86,28.04 97.94,28.96 72.03,28.96 65.63,35.36 v65.63,40.23
N$35  (via drill 0.35)
  Top 0.305: v32.11,78.64 v38.51,78.64 48.26,68.89 48.26,47.85 v55.27,40.84 | INST_REGISTER1:LED14.A 76.3,114.3 76.3,113.69 74.17,111.56 v74.17,110.95 74.17,108.81 90.02,92.96 90.02,74.68 94.29,70.41 107.39,70.41 111.66,66.14 112.88,66.14 CONTROL_LOGIC1:IC2.3 | v65.02,34.75 97.94,34.75 103.43,29.26 112.88,29.26 CONTROL_LOGIC1:IC1.3
  Bottom 0.305: v32.11,78.64 31.8,78.94 31.5,78.64 28.75,78.64 28.14,79.25 24.79,79.25 24.18,79.86 22.96,79.86 INST_REGISTER1:IC2.4 | v38.51,78.64 40.64,78.64 69.6,107.59 73.25,107.59 74.17,108.51 v74.17,110.95 | v65.02,34.75 58.93,40.84 v55.27,40.84
N$36  (via drill 0.35)
  Top 0.305: v141.22,36.88 146.71,36.88 147.01,36.58 149.15,38.71 149.15,53.34 129.64,72.85 118.97,72.85 114.4,68.28 113.49,68.28 113.18,68.58 CONTROL_LOGIC1:IC2.2 | v31.5,92.35 31.19,92.35 26.92,88.09 26.92,80.77 23.88,77.72 22.96,77.72 INST_REGISTER1:IC2.5 | v109.22,71.02 98.86,81.38 94.29,81.38 93.98,81.08 93.68,81.38 93.37,81.38 90.63,84.12 90.63,93.27 83.31,100.58 83.31,113.08 82.7,113.69 82.7,114.3 INST_REGISTER1:LED15.A
  Bottom 0.305: v141.22,36.88 134.82,30.48 129.95,30.48 129.64,30.79 129.34,30.48 116.23,30.48 115.01,31.7 113.18,31.7 CONTROL_LOGIC1:IC1.2 | v31.5,92.35 31.5,92.05 31.19,91.75 31.19,91.14 31.8,90.53 51.31,90.53 72.64,111.86 79.96,111.86 82.09,114 82.4,114 82.7,114.3 INST_REGISTER1:LED15.A | CONTROL_LOGIC1:IC2.2 111.66,68.58 v109.22,71.02
N$37  (via drill 0.35)
  Top 0.305: v32.11,91.44 31.19,91.44 27.53,87.78 27.53,78.94 23.57,74.98 22.96,74.98 INST_REGISTER1:IC2.6 | v101.3,85.95 113.18,74.07 113.18,71.32 CONTROL_LOGIC1:IC2.1
  Bottom 0.305: CONTROL_LOGIC1:IC1.1 113.18,34.14 114.4,34.14 115.62,32.92 129.34,32.92 129.64,33.22 129.95,32.92 135.74,32.92 142.14,39.32 146.71,39.32 147.01,39.62 147.32,39.32 148.54,40.54 148.54,53.95 129.64,72.85 113.79,72.85 112.57,71.63 112.57,71.32 112.88,71.02 CONTROL_LOGIC1:IC2.1 | v32.11,91.44 45.82,91.44 66.85,112.47 79.35,112.47 80.87,114 80.87,114.91 82.09,116.13 86.36,116.13 88.19,114.3 | INST_REGISTER1:LED16.A 88.19,114.3 | v101.3,85.95 101.3,96.93 89.71,108.51 89.71,112.78 88.19,114.3
N$79
  Top 0.305: SV23.3 143.36,45.72 143.36,45.41 141.83,43.89 133.3,43.89 129.03,48.16 128.42,48.16 CONTROL_LOGIC1:IC2.15
  Bottom 0.305: CONTROL_LOGIC1:LED8.A 72.34,32 72.34,32.31 81.18,41.15 120.5,41.15 127.51,48.16 128.12,48.16 CONTROL_LOGIC1:IC2.15
N$80  (via drill 0.35)
  Top 0.305: v134.52,45.72 129.64,50.6 128.42,50.6 CONTROL_LOGIC1:IC2.16
  Bottom 0.305: 134.82,45.41 137.26,47.85 141.53,47.85 142.44,46.94 144.58,46.94 145.49,47.85 145.49,48.16 145.8,48.46 SV23.2 | 134.82,45.41 129.34,39.93 115.62,39.93 105.87,30.18 85.45,30.18 83.92,31.7 CONTROL_LOGIC1:LED7.A | 134.82,45.41 v134.52,45.72
N$81
  Bottom 0.305: 130.56,48.46 130.56,51.82 129.03,53.34 CONTROL_LOGIC1:IC2.17 | 130.56,48.46 130.56,42.37 128.73,40.54 103.43,40.54 95.2,32.31 95.2,32 CONTROL_LOGIC1:LED6.A | 130.56,48.46 143.36,48.46 SV23.1
PC_LE  (via drill 0.35)
  Top 0.305: CONTROL_LOGIC1:LED2.A 83.92,14.02 85.45,15.54 100.99,15.54 111.96,4.57 117.15,4.57 126.9,14.33 127.2,14.02 128.12,14.02 CONTROL_LOGIC1:IC1.16 128.42,14.02 129.03,14.02 130.25,15.24 v132.08,15.24
  Bottom 0.305: SV23.10 146.71,38.1 147.93,36.88 147.93,29.87 133.3,15.24 v132.08,15.24
PC_LRS
  Bottom 0.305: CONTROL_LOGIC1:LED1.A 95.2,13.72 95.2,13.41 97.94,10.67 105.87,10.67 111.96,4.57 115.62,4.57 127.51,16.46 128.12,16.46 CONTROL_LOGIC1:IC1.17 128.42,16.76 129.34,16.76 130.56,17.98 130.56,24.99 143.36,37.8 143.36,38.1 SV23.9
RAM_LRS  (via drill 0.35)
  Top 0.305: v42.47,37.49 19.91,37.49 14.43,32 14.12,32 CONTROL_LOGIC1:LED21.A | SV23.8 146.1,40.84 146.41,40.84 147.93,42.37 147.93,48.77 136.96,59.74 127.2,59.74 126.9,59.44 126.59,59.74 122.63,59.74 113.79,50.9 113.18,50.9 CONTROL_LOGIC1:IC2.9
  Bottom 0.305: v42.47,37.49 47.35,42.37 103.73,42.37 111.96,50.6 112.88,50.6 CONTROL_LOGIC1:IC2.9
S$3  (via drill 0.35)
  Top 0.305: CONTROL_LOGIC1:IC5.5 68.68,50.9 68.68,53.34 CONTROL_LOGIC1:IC5.4 | CONTROL_LOGIC1:R22.2 147.32,17.07 146.41,17.98 | 146.41,17.98 143.05,14.63 143.05,10.36 147.62,5.79 147.62,5.49 147.32,5.18 CONTROL_LOGIC1:S1.1B | v100.69,71.32 104.65,71.32 v106.17,72.85 | v119.28,74.98 128.42,74.98 149.76,53.65 149.76,21.34 146.41,17.98
  Bottom 0.305: CONTROL_LOGIC1:IC5.4 69.29,53.34 70.51,54.56 77.22,54.56 77.52,54.86 77.83,54.56 83.92,54.56 v100.69,71.32 | v106.17,72.85 109.22,72.85 111.35,74.98 v119.28,74.98
SLC_ADDR  (via drill 0.35)
  Top 0.305: CONTROL_LOGIC1:LED20.A 26.62,32 26.62,32.31 27.84,33.53 42.77,33.53 51.31,24.99 52.83,24.99 54.05,26.21 54.05,27.13 68.99,42.06 106.17,42.06 112.27,48.16 112.88,48.16 CONTROL_LOGIC1:IC2.10 113.18,48.46 114.1,48.46 122.63,57 130.25,57 139.39,47.85 v139.39,46.94
  Bottom 0.305: v139.39,46.94 139.39,42.06 140.61,40.84 143.36,40.84 SV23.7
VCC  (via drill 0.35)
  Top 0.305: 130.25,18.29 138.48,10.06 139.7,10.06 CONTROL_LOGIC1:S1.NO | 130.25,18.29 129.64,18.9 128.42,18.9 CONTROL_LOGIC1:IC1.18 | 130.25,18.29 130.56,18.59 130.56,33.22 129.64,34.14 128.42,34.14 CONTROL_LOGIC1:IC1.24 | v135.43,44.81 135.43,49.99 129.64,55.78 128.42,55.78 CONTROL_LOGIC1:IC2.18 | 64.72,74.68 63.8,74.68 62.89,73.76 58.93,73.76 58.01,74.68 57.4,74.68 CONTROL_LOGIC1:V1.7 | 64.72,74.68 64.72,72.54 CONTROL_LOGIC1:V1.9 64.72,72.24 64.72,71.63 65.63,70.71 67.46,70.71 73.86,64.31 | 64.72,74.68 CONTROL_LOGIC1:V1.10 | 73.86,64.31 76,62.18 76,60.96 CONTROL_LOGIC1:IC5.14 | 73.86,64.31 83.31,73.76 | 83.31,73.76 86.97,77.42 87.58,77.42 CONTROL_LOGIC1:IC3.6 | JP5.2 114.1,115.52 113.18,115.52 95.5,97.84 95.5,90.22 CONTROL_LOGIC1:IC3.16 | 83.31,73.76 92.15,64.92 115.01,64.92 120.8,70.71 122.94,70.71 123.24,70.41 126.29,70.41 126.9,71.02 128.12,71.02 CONTROL_LOGIC1:IC2.24
  Bottom 0.305: CONTROL_LOGIC1:IC2.18 128.42,56.08 129.64,56.08 130.56,57 130.56,69.49 129.03,71.02 128.42,71.02 CONTROL_LOGIC1:IC2.24 | v135.43,44.81 135.43,42.98 128.42,35.97 128.42,34.44 CONTROL_LOGIC1:IC1.24 | CONTROL_LOGIC1:IC3.16 95.2,89.92 94.29,89.92 90.02,85.65 90.02,79.25 88.49,77.72 87.88,77.72 CONTROL_LOGIC1:IC3.6
ZF  (via drill 0.35)
  Top 0.305: v66.55,40.84 68.38,42.67 100.69,42.67 111.05,53.03 | 111.05,53.03 111.66,53.65 112.57,53.65 112.88,53.34 CONTROL_LOGIC1:IC2.8 | JP12.1 124.46,116.43 122.63,118.26 113.79,118.26 111.05,115.52 111.05,114.3 92.76,96.01 92.76,84.43 93.37,83.82 96.42,83.82 96.72,84.12 98.86,81.99 99.47,81.99 110.13,71.32 110.13,69.49 v109.83,69.19 | v109.83,59.44 109.83,56.08 110.74,55.17 110.74,53.34 111.05,53.03
  Bottom 0.305: v66.55,40.84 66.55,35.36 72.34,29.57 98.55,29.57 99.77,28.35 99.77,27.74 104.34,23.16 105.56,23.16 111.96,16.76 112.88,16.76 CONTROL_LOGIC1:IC1.8 | v109.83,59.44 v109.83,69.19
|ALUWRITE  (via drill 0.35)
  Top 0.305: v148.84,29.87 148.84,32.92 146.41,35.36 146.1,35.36 SV23.12
  Bottom 0.305: CONTROL_LOGIC1:LED4.A 61.06,13.72 64.11,10.67 70.82,10.67 77.83,3.66 111.05,3.66 111.35,3.35 116.23,3.35 120.8,7.92 126.59,7.92 127.51,8.84 128.12,8.84 CONTROL_LOGIC1:IC1.14 128.42,9.14 129.34,9.14 130.56,10.36 130.56,11.58 v148.84,29.87
|AREAD  (via drill 0.35)
  Top 0.305: v33.93,64.31 36.68,64.31 44.91,56.08 45.52,56.08 INST_REGISTER1:IC1.3
  Bottom 0.305: v33.93,64.31 31.5,64.31 31.19,64.62 15.34,64.62 8.64,57.91 8.64,57.3 JP11.1
|AWRITE  (via drill 0.35)
  Top 0.305: v133.3,28.96 v136.65,28.96 | v120.8,16.15 115.01,10.36 115.01,10.06 114.1,9.14 113.18,9.14 CONTROL_LOGIC1:IC1.11
  Bottom 0.305: CONTROL_LOGIC1:LED14.A 38.2,14.02 40.34,16.15 104.04,16.15 111.66,8.53 111.96,8.84 112.88,8.84 CONTROL_LOGIC1:IC1.11 | v136.65,28.96 140.61,32.92 141.53,32.92 142.75,31.7 144.58,31.7 145.8,32.92 SV23.14 | v133.3,28.96 132.38,28.04 132.38,27.74 129.95,25.3 126.59,25.3 120.8,19.51 v120.8,16.15
|BREAD  (via drill 0.35)
  Top 0.305: v35.76,46.94 43.99,46.94 45.21,48.16 45.52,48.16 INST_REGISTER1:IC1.6
  Bottom 0.305: v35.76,46.94 34.85,46.94 31.8,43.89 20.52,43.89 9.86,54.56 8.94,54.56 JP11.2
|CLR  (via drill 0.35)
  Top 0.305: CONTROL_LOGIC1:IC5.9 76.3,48.46 76.3,50.6 CONTROL_LOGIC1:IC5.10 76,50.9 75.39,50.9 73.86,52.43 73.86,56.39 69.29,60.96 CONTROL_LOGIC1:IC5.1 | v85.45,99.67 101.3,115.52 106.48,115.52 JP13.2
  Bottom 0.305: CONTROL_LOGIC1:IC5.6 68.68,48.46 69.6,48.46 70.51,49.38 74.47,49.38 75.39,48.46 76,48.46 CONTROL_LOGIC1:IC5.9 | v85.45,99.67 71.12,99.67 62.28,90.83 62.28,84.43 62.89,83.82 65.94,83.82 66.24,84.12 68.38,81.99 68.38,60.96 CONTROL_LOGIC1:IC5.1
|FL
  Top 0.305: 128.73,6.1 128.73,5.79 126.9,3.96 88.8,3.96 77.22,15.54 51.31,15.54 49.78,14.02 CONTROL_LOGIC1:LED5.A | 128.73,6.1 128.42,6.4 CONTROL_LOGIC1:IC1.13 128.73,6.1 | 128.73,6.1 129.95,7.32 139.7,7.32 141.53,9.14 141.53,31.09 143.36,32.92 SV23.13
|INSTREAD  (via drill 0.35)
  Top 0.305: v140.31,42.37 140,42.67 132.08,42.67 130.86,43.89 130.25,43.89 129.64,43.28 128.42,43.28 CONTROL_LOGIC1:IC2.13 128.42,42.98 128.42,41.45 115.01,28.04 111.96,28.04 111.66,27.74 111.35,28.04 103.73,28.04 98.25,33.53 67.77,33.53 v65.02,30.79 | INST_REGISTER1:IC3.9 30.58,95.4 30.58,97.54 INST_REGISTER1:IC3.10 | CONTROL_LOGIC1:LED18.A 49.48,32 33.02,48.46 33.02,66.14 30.58,68.58 30.58,69.8 INST_REGISTER1:IC2.9 30.58,70.1 30.58,72.24 INST_REGISTER1:IC2.10
  Bottom 0.305: v140.31,42.37 142.44,44.5 144.88,44.5 146.1,45.72 SV23.4 | JP10.2 8.94,72.24 10.16,72.24 14.43,67.97 29.67,67.97 30.89,69.19 30.89,69.49 30.58,69.8 INST_REGISTER1:IC2.9 | INST_REGISTER1:IC3.9 30.58,95.1 30.58,90.53 33.02,88.09 33.02,74.37 31.19,72.54 30.58,72.54 INST_REGISTER1:IC2.10 | v65.02,30.79 64.41,30.18 50.39,30.18 49.48,31.09 49.48,31.7 CONTROL_LOGIC1:LED18.A
|RAM_OUT
  Bottom 0.305: CONTROL_LOGIC1:LED19.A 38.2,32 47.95,41.76 107.39,41.76 111.66,46.02 112.57,46.02 112.88,45.72 CONTROL_LOGIC1:IC2.11 113.18,45.72 113.49,45.41 114.4,45.41 123.55,54.56 126.59,54.56 126.9,54.86 127.2,54.56 142.14,54.56 147.93,48.77 147.93,44.81 146.41,43.28 146.1,43.28 SV23.6
|REG_READ  (via drill 0.35)
  Top 0.305: v141.22,32 137.26,35.97 126.9,35.97 125.98,35.05 125.98,23.16 114.4,11.58 113.18,11.58 CONTROL_LOGIC1:IC1.10 112.88,11.58 111.66,11.58 108,15.24 v102.51,15.24
  Bottom 0.305: v141.22,32 142.75,30.48 SV23.15 | 31.19,18.29 36.37,23.47 36.37,42.06 | 31.19,18.29 26.92,14.02 CONTROL_LOGIC1:LED15.A | 43.69,49.38 44.91,50.6 45.52,50.6 INST_REGISTER1:IC1.5 | 43.69,49.38 36.37,42.06 | 43.69,49.38 43.38,49.68 43.38,56.69 44.91,58.22 45.52,58.22 INST_REGISTER1:IC1.2 | 36.37,42.06 18.09,42.06 6.2,53.95 6.2,65.53 8.94,68.28 8.94,69.8 JP10.1 | v102.51,15.24 98.86,15.24 98.55,15.54 44.6,15.54 41.25,12.19 37.29,12.19 31.19,18.29

## Text on the board
tValues: Instruction Register/Talimat Kaydedicisi | CLR | POWER | Flags | 8Bit Bus | Control Logic/Kontrol Mantığı | Control Signals | Control Signal Output | Clear-M